# Altium PCB AQM with ESP32-C3.PcbDoc
Units mil, origin at the board's own origin, x right, y up, seen from the top; angles counter-clockwise.
Board outline 2620 x 2460 mil, 4 copper layers (Top Layer, Layer 1 - GND, Layer 2 - Power, Bottom Layer), stack 23.756 mil thick; 60 components, 44 nets, 195 pads, 22 vias.
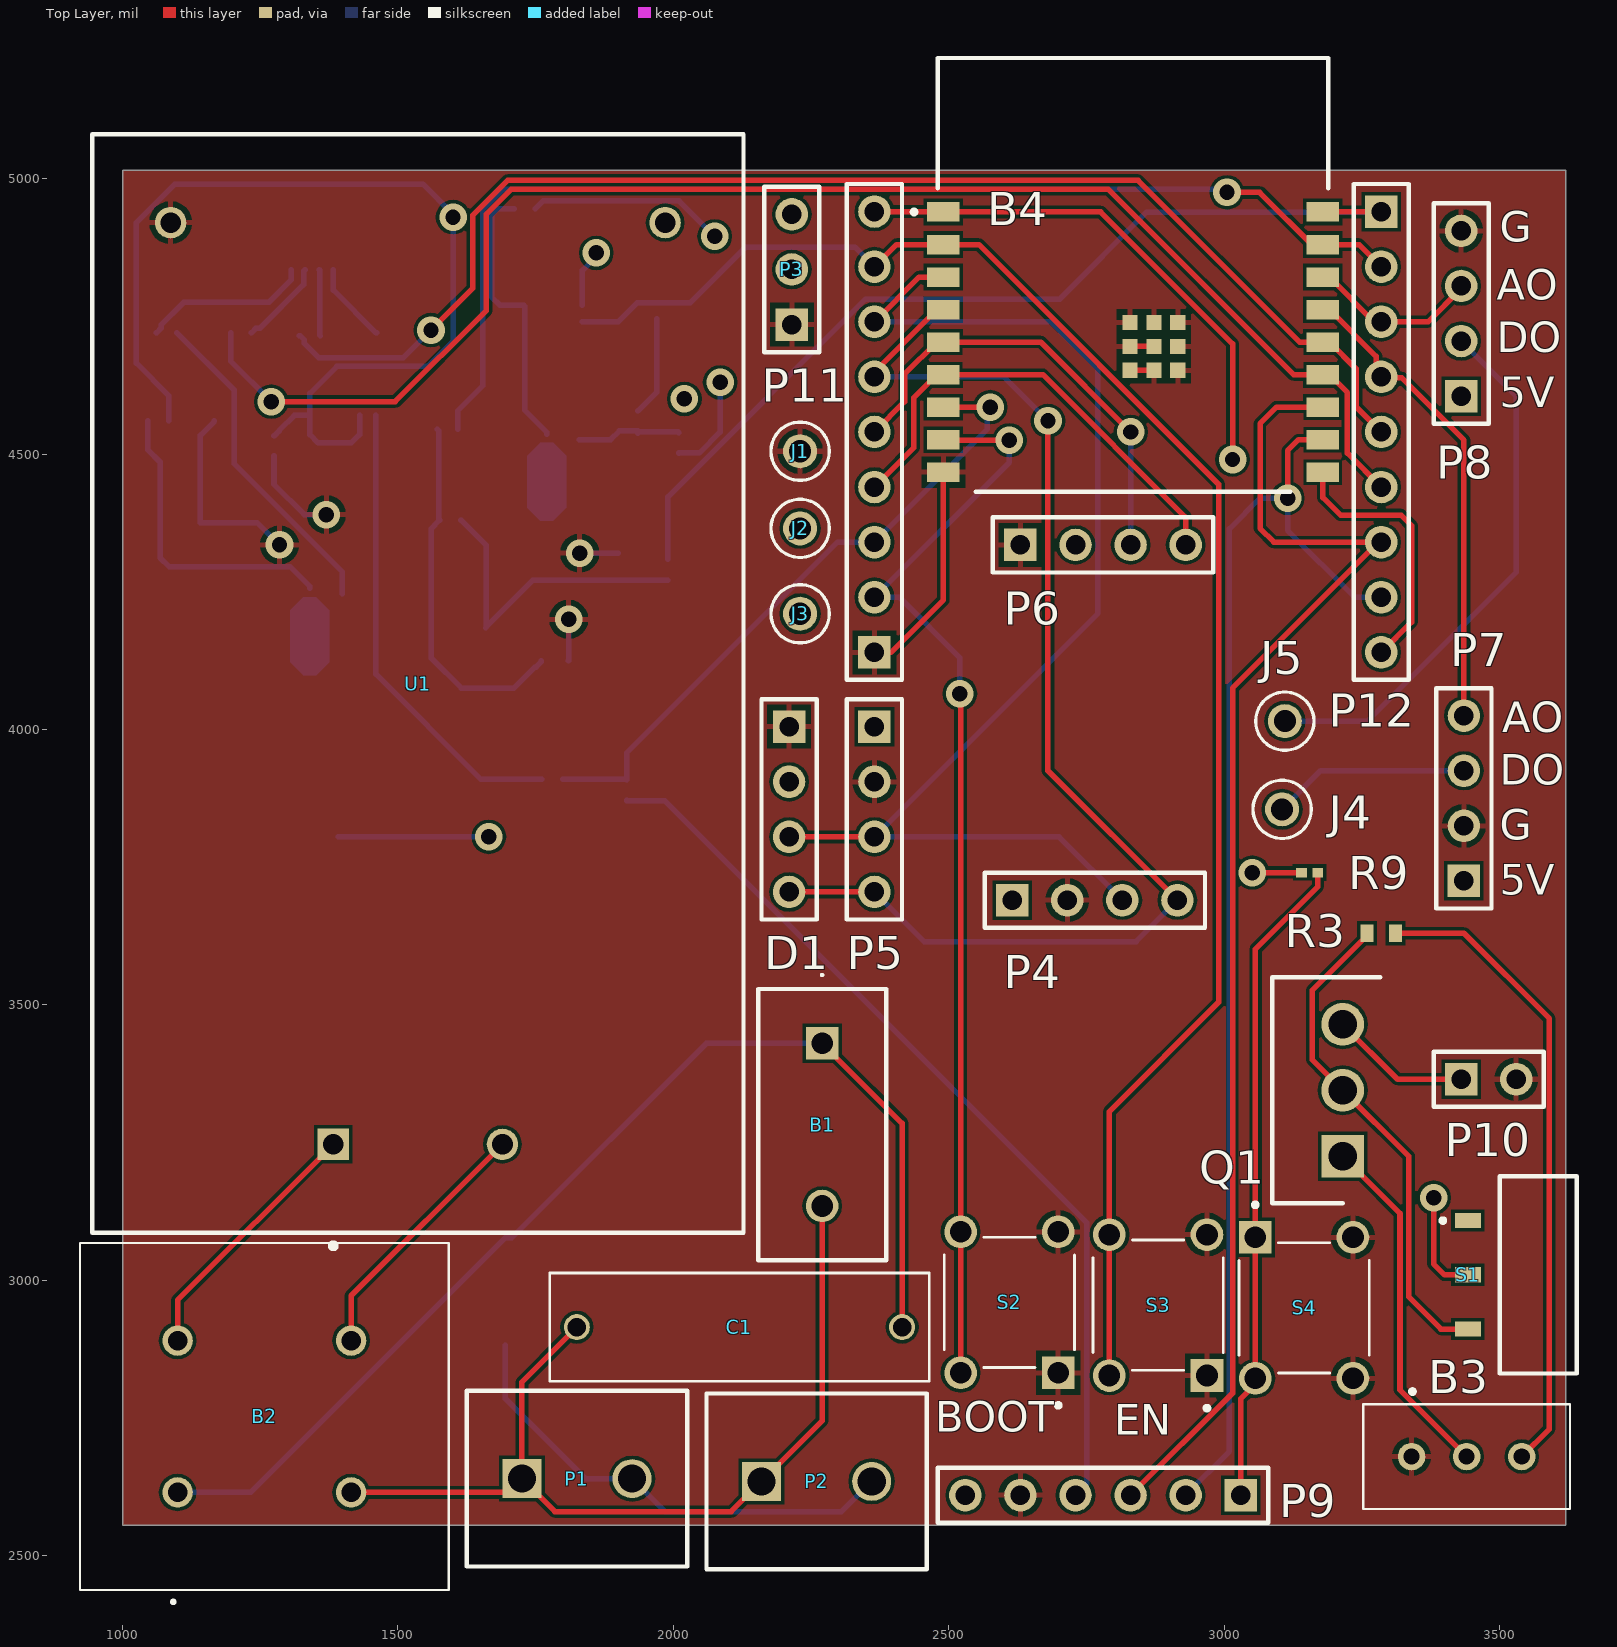
[diagram p0: Top Layer view]
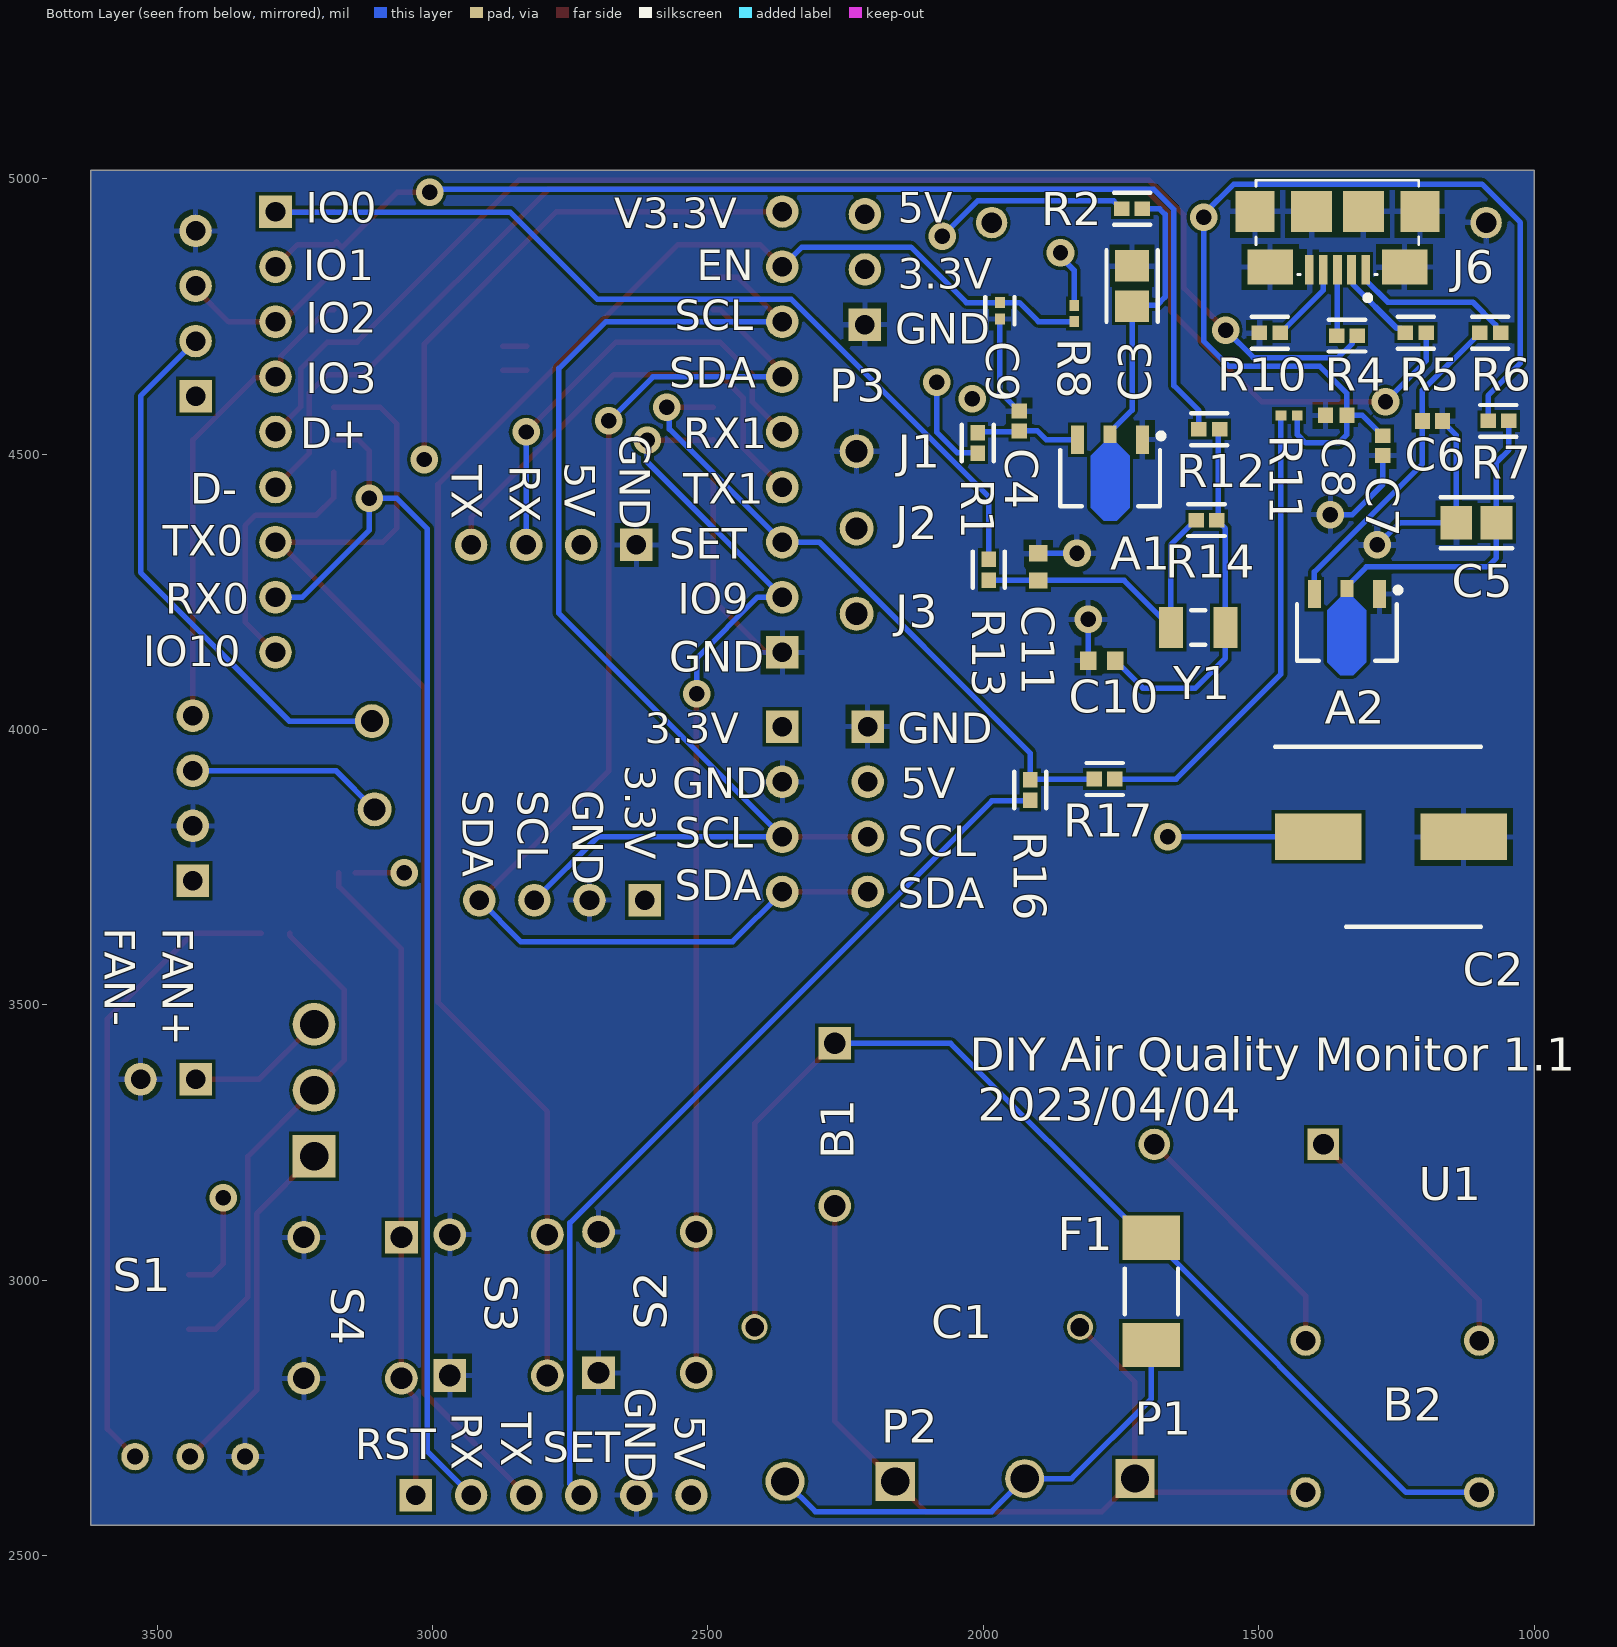
[diagram p1: Bottom Layer view, seen from below]
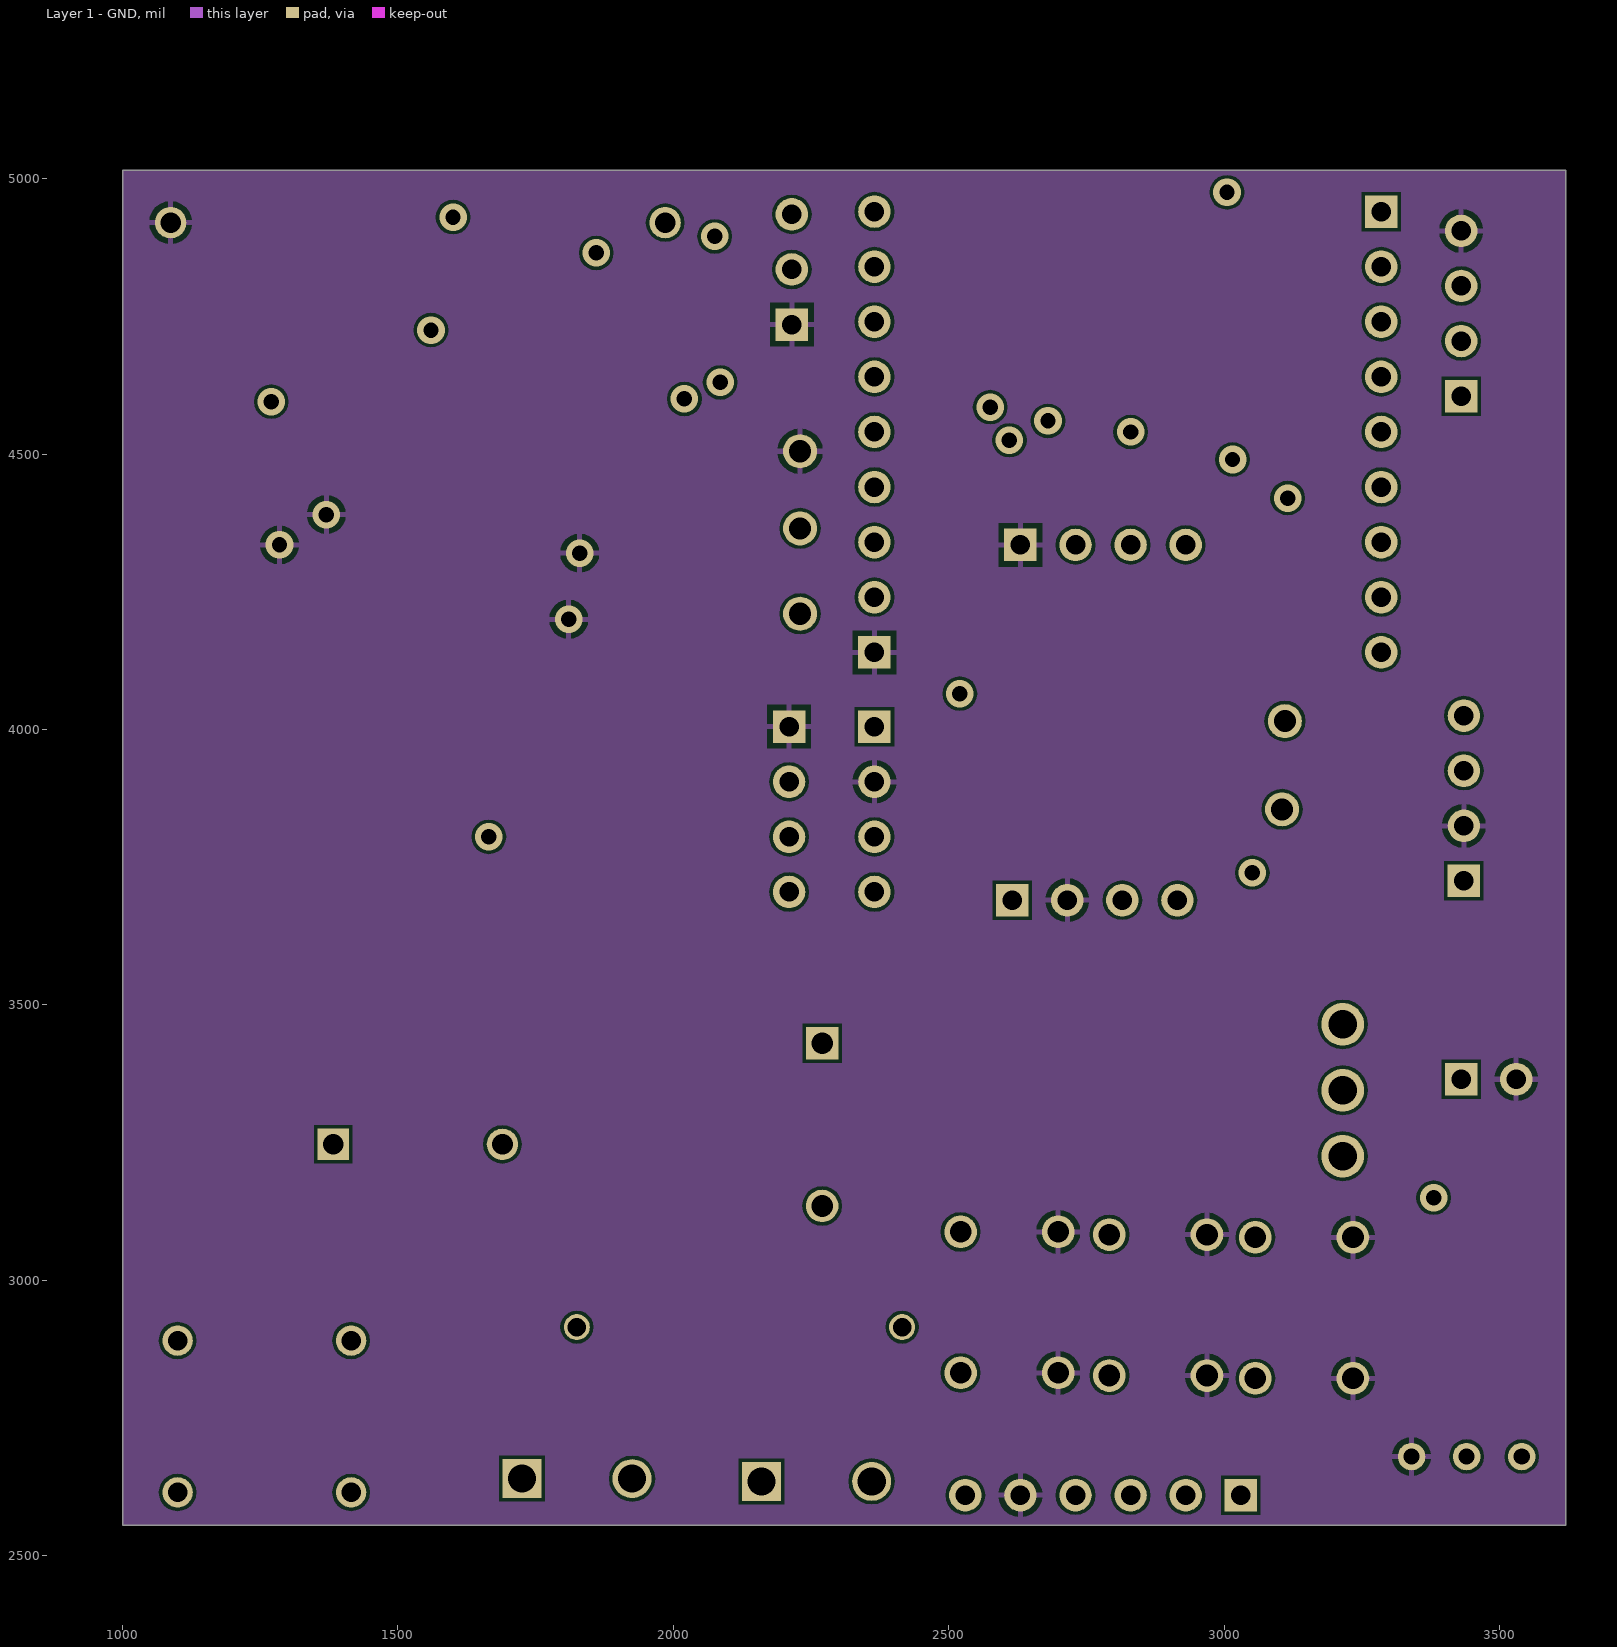
[diagram p2: Layer 1 - GND]
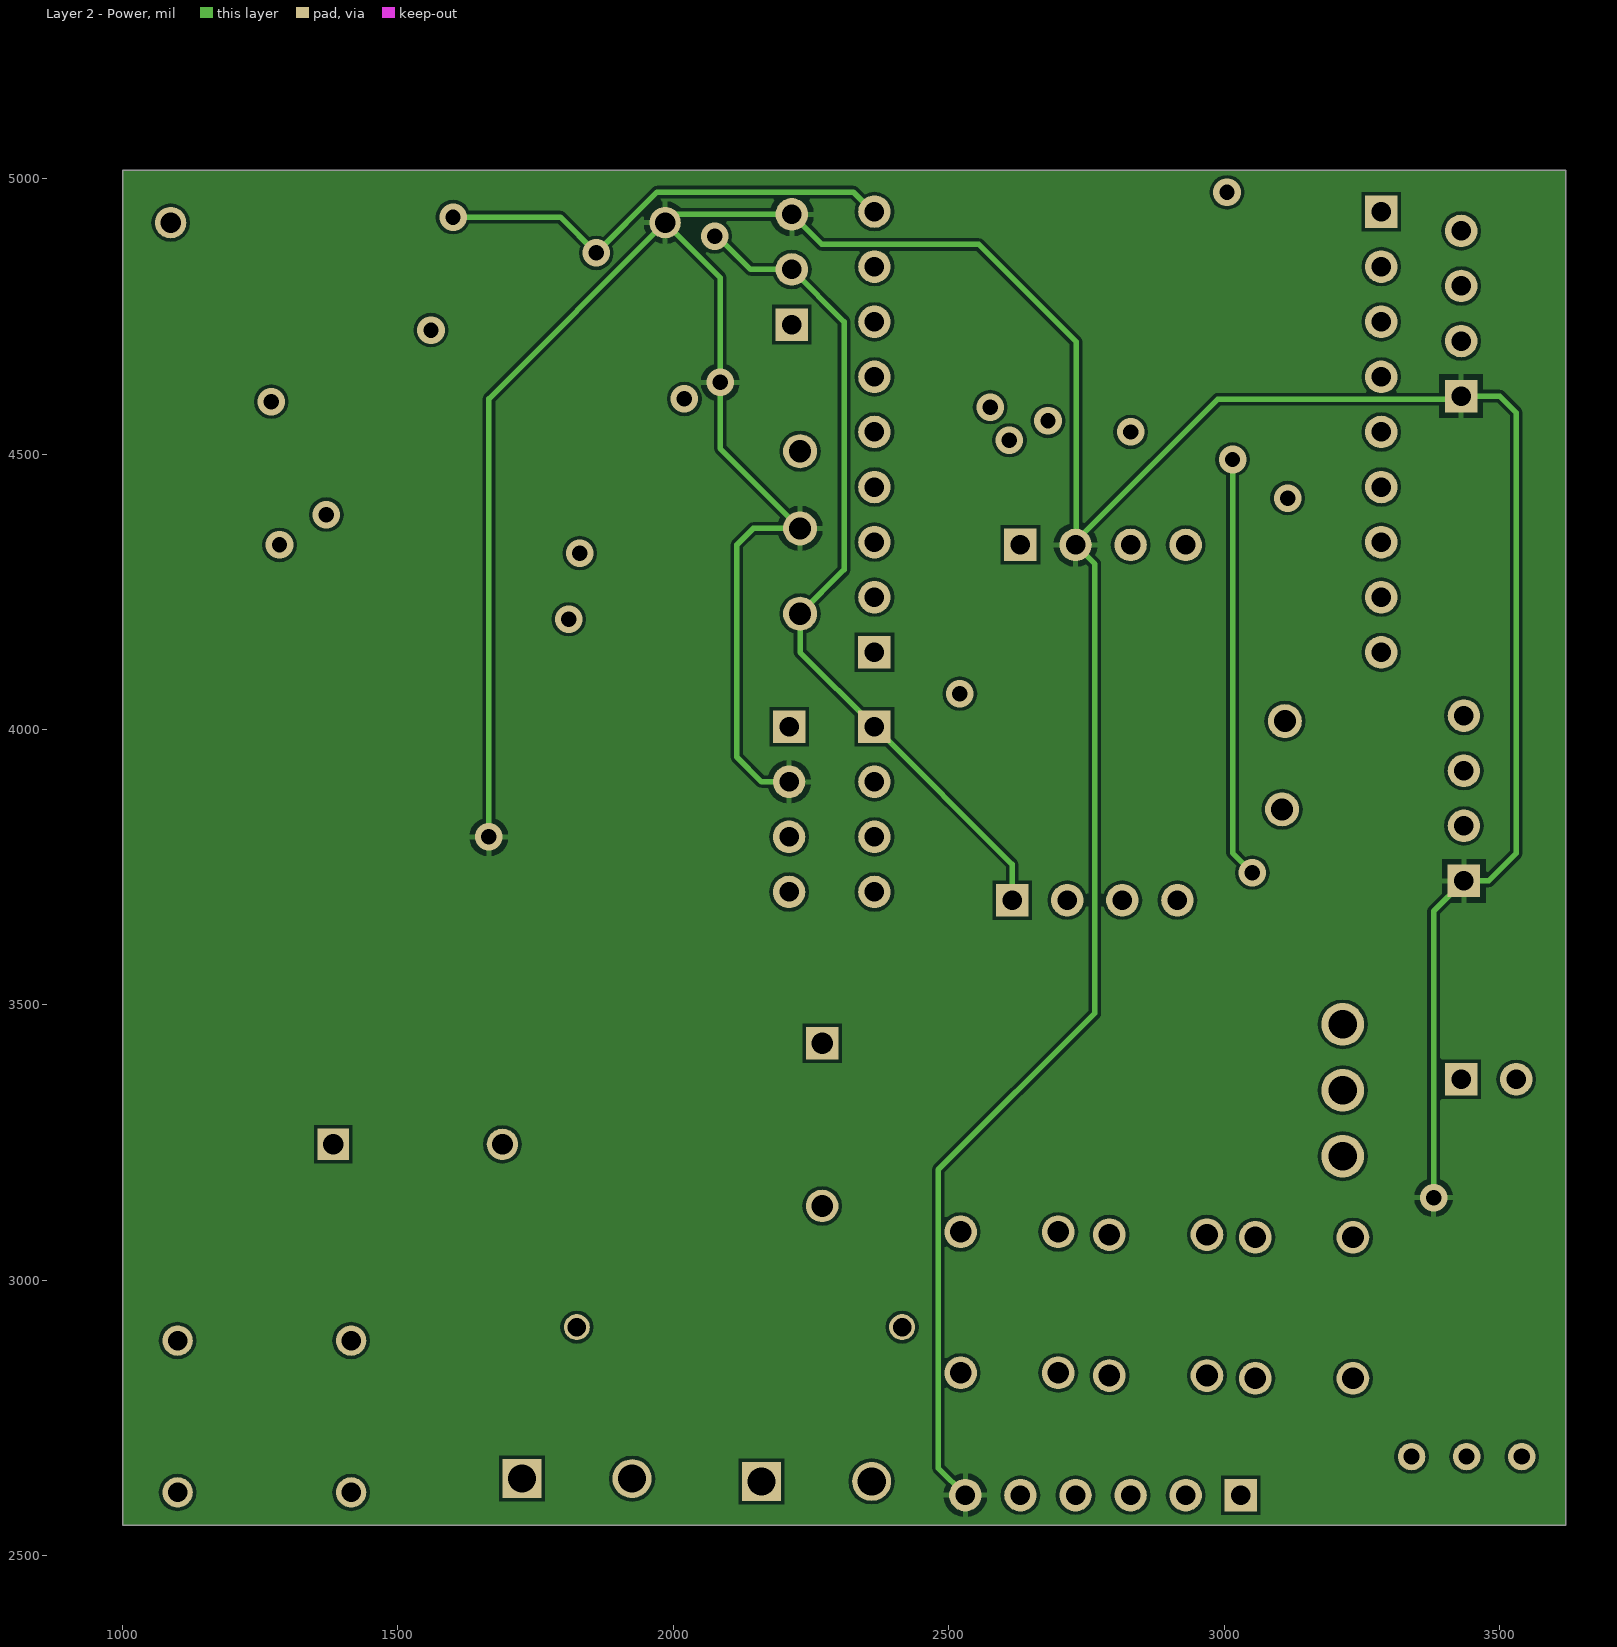
[diagram p3: Layer 2 - Power]
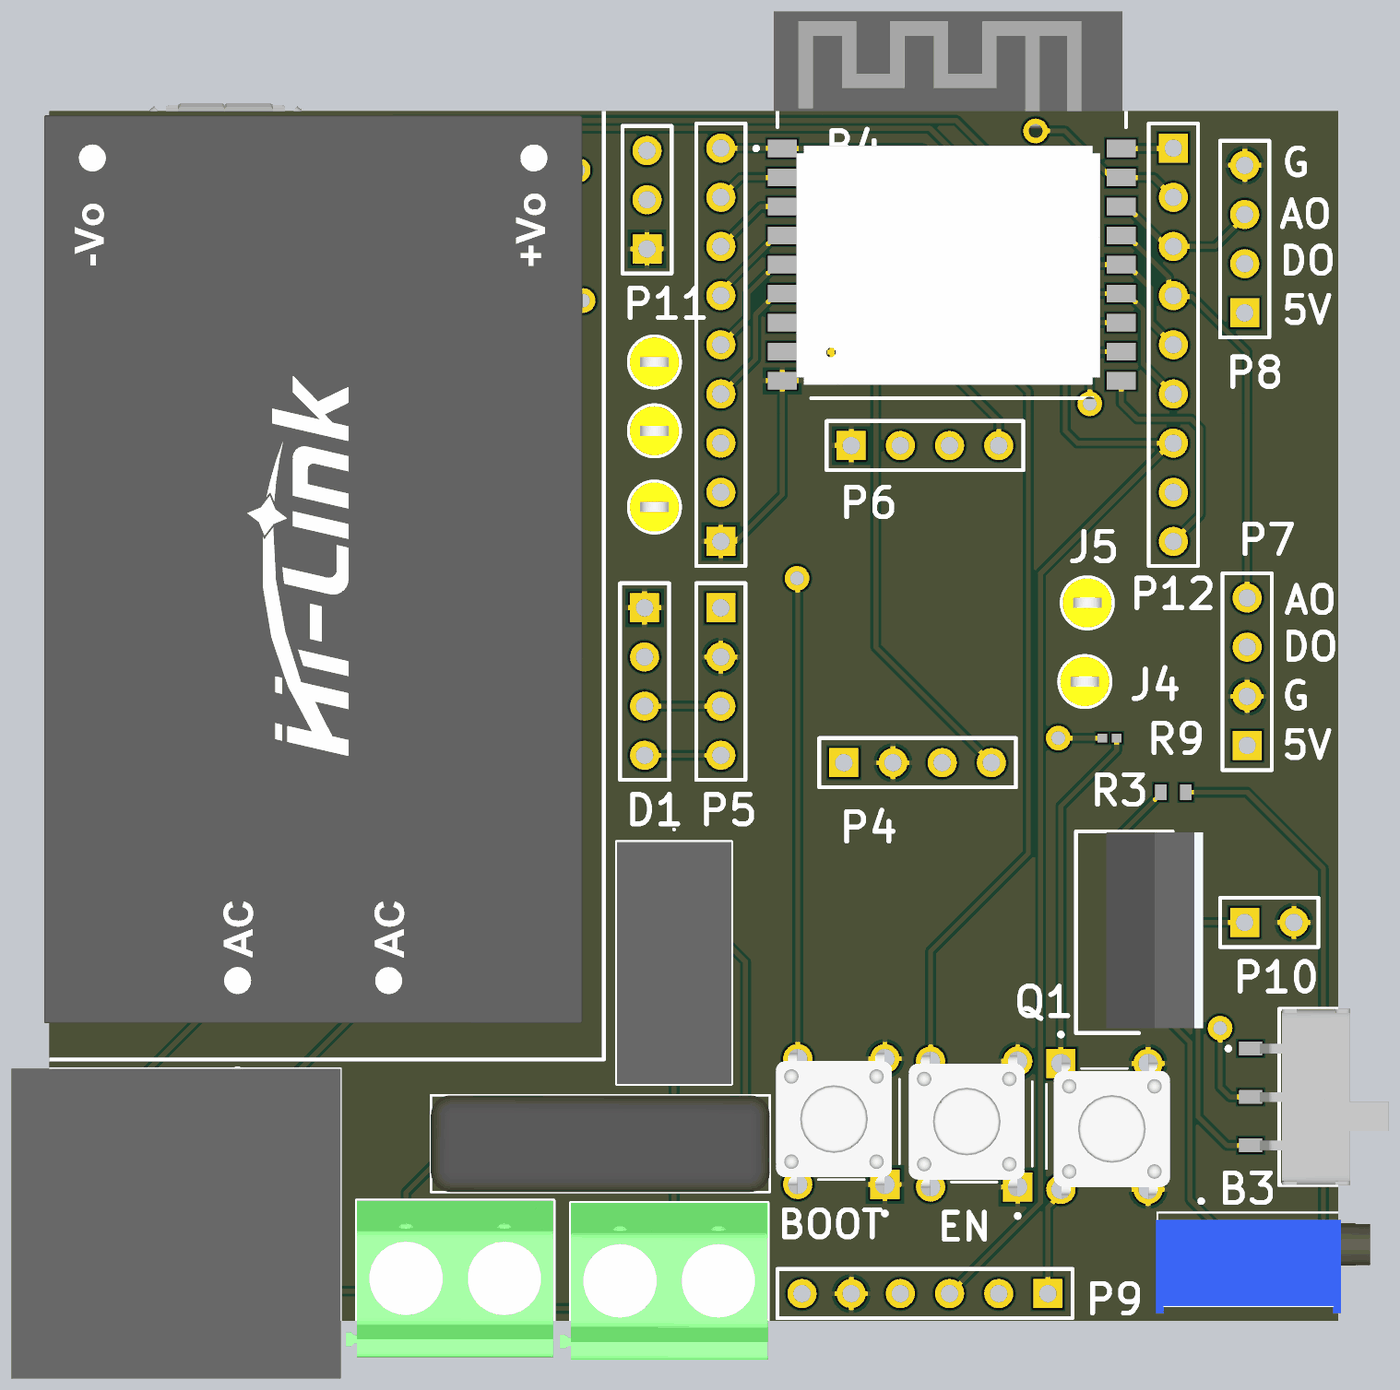
[diagram p4: 3D render of the assembled board from above, using the file's embedded part models]
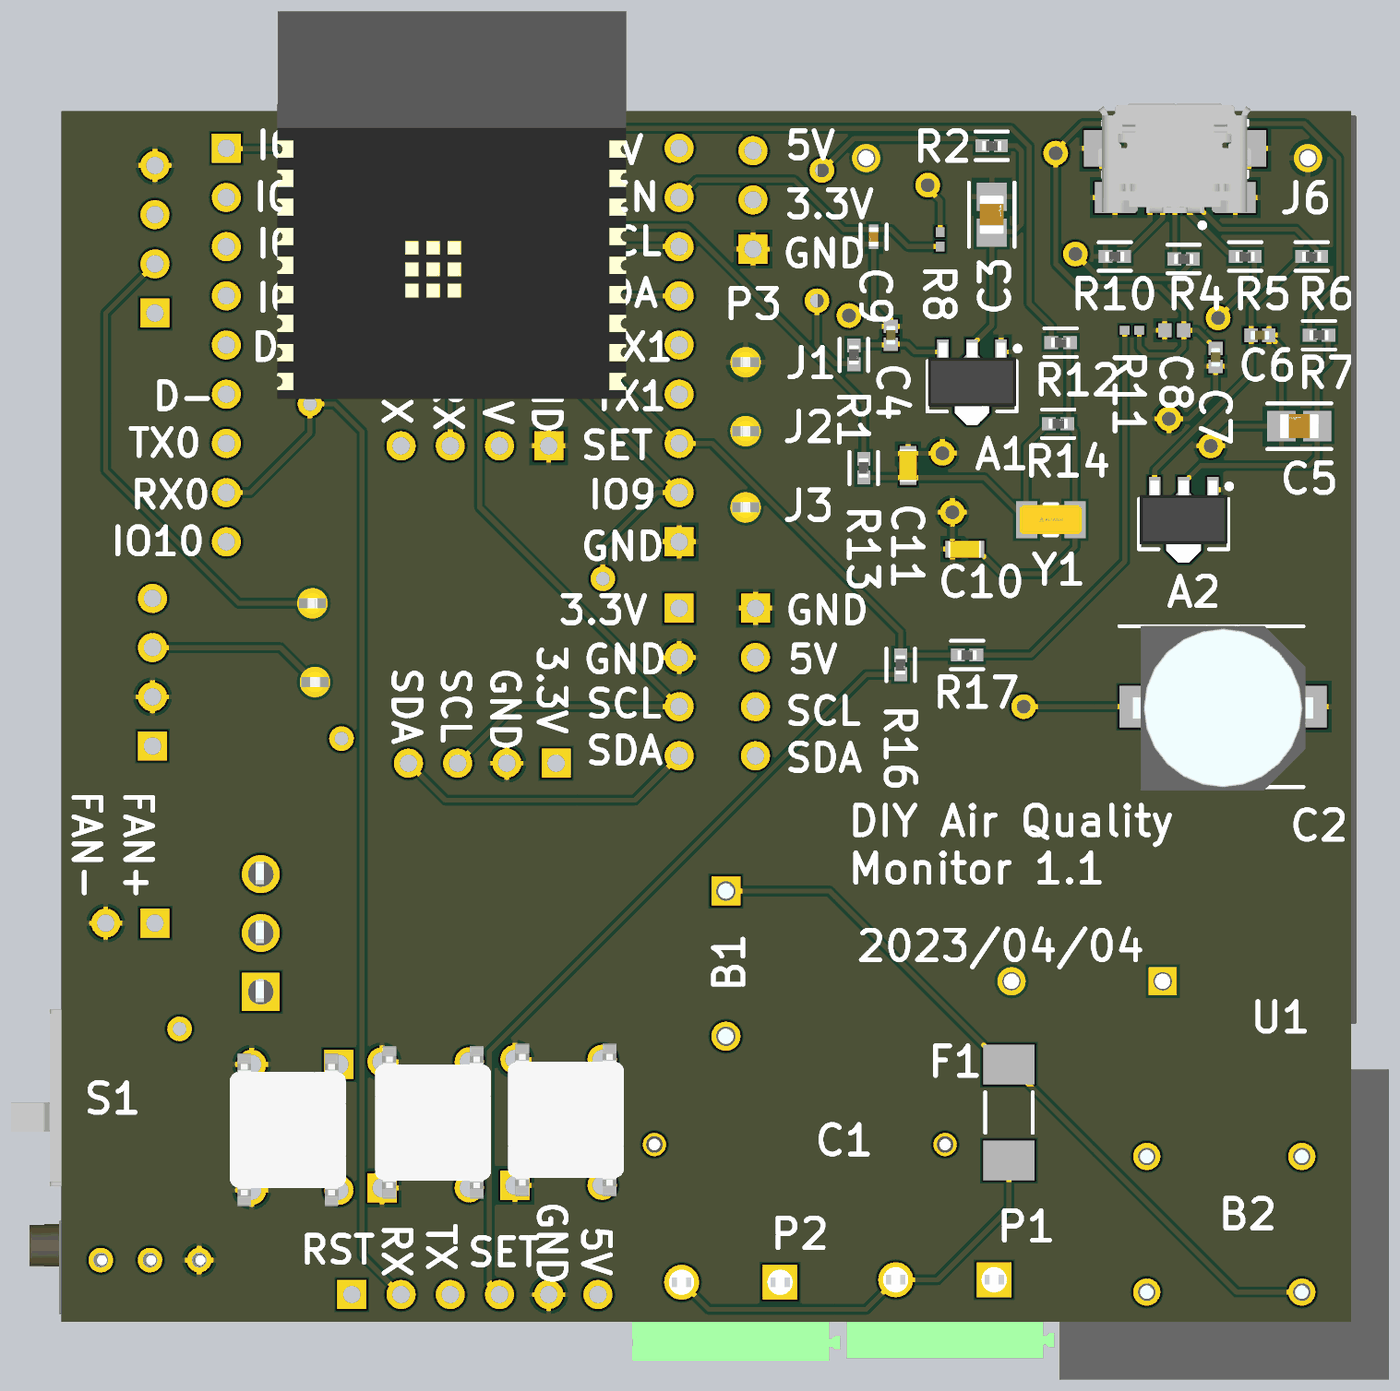
[diagram p5: 3D render of the assembled board from below, using the file's embedded part models]

## Layer stack, top to bottom
Top Solder: solder mask 0.4, Solder Resist, Dk 3.5
Top Layer: signal copper 1.4
Dielectric 2: prepreg 2.8, PP-006, Dk 4.1
Layer 1 - GND: signal copper 1.378
Dielectric 1: dielectric 12.6, FR-4, Dk 4.8
Layer 2 - Power: signal copper 1.378
Dielectric 3: prepreg 2.8, PP-006, Dk 4.1
Bottom Layer: signal copper 1.4
Bottom Solder: solder mask 0.4, Solder Resist, Dk 3.5

## Board outline
1000,2555 3620,2555 3620,5015 1000,5015

## Design rules (kind name [scope] priority, off if disabled: settings)
Clearance [All] p1: gap=5.98 ignorepadtopadclearanceinfootprint=FALSE
MinimumSolderMaskSliver [All] p1: minsoldermaskwidth=0.98
PolygonConnect [All] p1: connectstyle=Relief reliefconductorwidth=10 reliefentries=4 polygonreliefangle="90 Angle" airgapwidth=10
RoutingVias [All] p1: holewidth=28 width=50 viastyle="Through Hole" minholewidth=28 minwidth=50 maxholewidth=28 maxwidth=50
SilkToSilkClearance [All] p1: silktosilkclearance=1
SilkToSolderMaskClearance [IsPad] p1: minsilkscreentomaskgap=5 clearancetoexposedcopper=TRUE
SolderMaskExpansion [All] p1: expansion=4
Width [All] p1: maxlimit=12.01 minlimit=5.98 preferedwidth=10
27 further rules are at their usual default settings.

## Classes and differential pairs
component class "esp32-c3 module": A2 C5 C6 C7 C8 C9 C10 C11 J6 P11 P12 R4 R5 R6 R7 R8 R10 R11 R12 R13 R14 R17 S2 S3 Y1
component class "AQM with esp32": A1 B1 B2 B3 C1 C2 C3 C4 D1 F1 J1 J2 J3 J4 J5 P1 P2 P3 P4 P5 P6 P7 P8 P9 P10 Q1 R1 R2 R3 R9 R16 S1 S4 U1

## Components (designator, comment, footprint, x,y, rotation, side; value= is the part's Value field where it differs from the comment)
A1 "IC1" SOT89-150P350X150-3N 1770,4465 r270 bottom
A2 "IC1" SOT89-150P350X150-3N 1340,4185 r270 bottom
B1 "10D561K" 10D561K 2270,3430.28 r270 top
B2 "UU9.8Y-10MH" UU98Y10MH 1100,2615 r270 top
B3 "3296X-1-103" 3296X1223LF 3440,2680 r270 top
B4 "ESP32-C3-WROOM-02-N4" ESP32C3WROOM02N4 2872.28,4695.24 r0 top
C1 "0.1uF" MPX-104K275VAC-C-D2 2120,2915 r180 top
C2 "220uF" CAPAE830X1050N 1260,3805 r180 bottom
C3 "22uF" FP-GRM219-0_2-0_15-IPC_A 1730,4805 r90 bottom
C4 "10uF" CL05A106MQ5NUNC 1935,4560 r270 bottom
C5 "22uF" FP-GRM219-0_2-0_15-IPC_A 1105,4375 r0 bottom
C6 "10uF" CL05A106MQ5NUNC 1185,4560 r0 bottom
C7 "10uF" CL05A106MQ5NUNC 1275,4515 r270 bottom
C8 "100nF" CAPC1050X55X23ML05T13 1359.29,4570 r0 bottom
C9 "1uF" FP-CL511-IPC_C 1970,4760 r270 bottom
C10 "12pF" CAPC1608X90X30LL10T20 1785,4125 r0 bottom
C11 "12pF" CAPC1608X90X30LL10T20 1900,4295 r90 bottom
D1 "Display" HDR1X4 2210,4005 r270 top
F1 "S6125-M2-0.5A" CAPC6125X25N 1695,2980 r90 bottom
J1 "5004" FP-5004-MFG 2230,4505 r0 top
J2 "5004" FP-5004-MFG 2230,4365 r0 top
J3 "5004" FP-5004-MFG 2230,4210 r0 top
J4 "5004" FP-5004-MFG 3105,3855 r0 top
J5 "5004" FP-5004-MFG 3110,4015 r0 top
J6 "10118192-0001LF" AMPHENOL_10118192-0001LF 1357.24,4834.69 r0 bottom
P1 "AC suppy" PHOE-1729128-2_V 1825,2640 r0 top
P2 "uv lamp" PHOE-1729128-2_V 2260,2635 r0 top
P3 "Header 3" HDR1X3 2215,4735 r90 top
P4 "Hum/Tem Sensor" HDR1X4 2615,3690 r0 top
P5 "CO2/VOC sensor" HDR1X4 2365,4005 r270 top
P6 "CH2O sensor" HDR1X4 2630,4335 r0 top
P7 "CO sensor" HDR1X4 3435,3725 r90 top
P8 "O3 sensor" HDR1X4 3430,4605 r90 top
P9 "PMS5003" HDR1X6 3030,2610 r180 top
P10 "5V FAN" HDR1X2 3430,3365 r0 top
P11 "Header 9" HDR1X9 2365,4140 r90 top
P12 "Header 9" HDR1X9 3285,4940 r270 top
Q1 "2SD313" TO304P498X1010X2089-3P 3215,3225.32 r90 top
R1 "0R" FP-RC0402-0_4-IPC_A 2010,4520 r270 bottom
R2 "0R" FP-RC0402-0_4-IPC_A 1730,4945 r180 bottom
R3 "470Ω" RESC1608X55X25LL10T15 3285,3630 r180 top value=470O
R4 "0R" FP-RC0402-0_4-IPC_A 1340,4715 r180 bottom
R5 "0R" FP-RC0402-0_4-IPC_A 1215,4720 r180 bottom
R6 "0R" FP-RC0402-0_4-IPC_A 1080,4720 r180 bottom
R7 "0R" FP-RC0402-0_4-IPC_A 1065,4560 r0 bottom
R8 "10kΩ" RESC1005X40X25LL05T10 1835,4755 r270 bottom value=10kO
R9 "10kΩ" RESC1005X40X25LL05T10 3155,3740 r0 top value=10kO
R10 "0R" FP-RC0402-0_4-IPC_A 1480,4720 r0 bottom
R11 "10kΩ" RESC1005X40X25LL05T10 1445,4570 r0 bottom value=10kO
R12 "0R" FP-RC0402-0_4-IPC_A 1590,4545 r180 bottom
R13 "0R" FP-RC0402-0_4-IPC_A 1990,4290 r270 bottom
R14 "0R" FP-RC0402-0_4-IPC_A 1595,4380 r180 bottom
R16 "0R" FP-RC0402-0_4-IPC_A 1915,3890 r270 bottom
R17 "0R" FP-RC0402-0_4-IPC_A 1780,3910 r180 bottom
S1 "Switch" SK3245SL1A 3570,3010 r270 top
S2 "TL1105AF160Q" TL1105AF160Q 2610,2960 r90 top
S3 "TL1105AF160Q" TL1105AF160Q 2880,2955 r90 top
S4 "TL1105AF160Q" TL1105AF160Q 3145,2950 r270 top
U1 "HLK-10M05" FP-HLK-10M05-MFG 1536.18,4083.39 r90 top
Y1 "32.768kHz" FP-ABS07-MFG 1610,4185 r180 bottom

## Footprints (in the part's own frame and the unit in brackets; to place one, negate y for a bottom-side part, rotate by r counter-clockwise, add the part's x,y. Pads: shape width x height; smd on the part's side, far side on the other; paste and mask are expansions set on the pad)
10D561K [mm]
  rect 1.5x1.5 hole 1: 1(0,0)
  round 1.5 hole 1: 2(7.5,0)
  silkscreen extent -3.2,-2.95 10,2.95, body extent -2.5,-2.95 10,2.95, height 15.6
3296X1223LF [mm]
  round 1.269 hole 0.74: 1(0,-2.54) 2(0,0) 3(0,2.54)
  silkscreen extent -3.1,-4.76 2.41,4.76, body extent -2.03,-4.83 2.8,6.22, height 10.03
AMPHENOL_10118192-0001LF [mm]
  rect 0.4x1.35 smd: 1(-1.3,0) 2(-0.65,0) 3(0,0) 4(0.65,0) 5(1.3,0)
  rect 2.1x1.6 smd: SH1(-3.1,-0.125) SH2(3.1,-0.125)
  rect 1.8x1.9 smd: SH3(-3.8,-2.675) SH6(3.8,-2.675)
  rect 1.9x1.9 smd: SH4(-1.2,-2.675) SH5(1.2,-2.675)
  silkscreen extent -3.75,-4.13 3.75,1.4, body extent -3.94,-4.99 3.98,0.67, height 3.09
CAPAE830X1050N [mm]
  rect 4x2.15 smd: 1(-3.35,0) 2(3.35,0)
  silkscreen extent -5.35,-4.15 4.15,4.15, body extent -4.65,-4.32 4.65,4.18, height 10.5
CAPC1050X55X23ML05T13 [mm] "Chip Capacitor, 2-Leads, Body 1.05x0.55mm, IPC Low Density"
  rect 0.69x0.72 smd: 1(-0.49,0) 2(0.49,0)
  body extent -0.53,-0.28 0.53,0.27, height 0.55
CAPC1608X90X30LL10T20 [mm] "Chip Capacitor, 2-Leads, Body 1.70x0.90mm, IPC High Density"
  rect 0.75x0.85 smd: 1(-0.625,0) 2(0.625,0)
  body extent -0.85,-0.45 0.85,0.45, height 0.9
CAPC6125X25N [mm] "Chip Capacitor, 2-Leads, Body 6.10x2.50mm, IPC Medium Density"
  rect 2.05x2.65 smd: 1(-2.475,0) 2(2.475,0)
  silkscreen extent -1.05,-1.22 1.05,1.23, body extent -3.15,-1.3 3.15,1.3, height 2.5
CL05A106MQ5NUNC [mm]
  rect 0.69x0.72 smd: 1(-0.46,0) 2(0.46,0)
  body extent -0.5,-0.25 0.5,0.25, height 0.7
ESP32C3WROOM02N4 [mm]
  rect 1.5x0.9 smd: 1(-9.71,6.2) 2(-9.71,4.7) 3(-9.71,3.2) 4(-9.71,1.7) 5(-9.71,0.2) 6(-9.71,-1.3) 7(-9.71,-2.8) 8(-9.71,-4.3) 9(-9.71,-5.8) 10(7.79,-5.8) 11(7.79,-4.3) 12(7.79,-2.8) 13(7.79,-1.3) 14(7.79,0.2) 15(7.79,1.7) 16(7.79,3.2) 17(7.79,4.7) 18(7.79,6.2)
  rect 0.7x0.7 smd: 19(0,0) 20(1.1,0) 21(1.1,1.1) 22(0,1.1) 23(-1.1,1.1) 24(-1.1,0) 25(-1.1,-1.1) 26(0,-1.1) 27(1.1,-1.1)
  silkscreen extent -11.16,-6.7 8.04,13.3, body extent -10.14,-6.73 7.86,13.27, height 1.6
FP-5004-MFG [mm]
  round 1.57 hole 1.02 paste-1000 mask+0: 1(0,0)
  silkscreen extent -1.35,-1.34 1.35,1.34, body extent -1.45,-1.45 1.45,1.45, height 0.25
FP-ABS07-MFG [mm]
  rect 1.1x1.9 smd paste+0 mask+0: 1(-1.25,0) 2(1.25,0)
  silkscreen extent -0.33,-0.8 0.33,0.8, body extent -1.6,-0.75 1.6,0.75, height 0.9
FP-CL511-IPC_C [mil]
  rect 20.29x18.6 smd paste+0 mask+0: 1(-14.9,0) 2(14.9,0)
  silkscreen extent -25,-27 25,27, body extent -20,-10 20,10, height 22
FP-GRM219-0_2-0_15-IPC_A [mil]
  rect 57.27x61.27 smd paste+0 mask+0: 1(-36.45,0) 2(36.45,0)
  silkscreen extent -65,-46 65,46, body extent -39,-25 39,25, height 39
FP-HLK-10M05-MFG [mm]
  rect 1.45x1.45 hole 0.95 paste-1000 mask+0: 1(-21.25,3.9)
  round 1.45 hole 0.95 paste-1000 mask+0: 2(-21.25,-3.9) 3(21.25,11.4) 4(21.25,-11.4)
  silkscreen extent -26.05,-15.01 25.33,15.01, body extent -25.43,-15.11 25.43,15.11, height 0.25
FP-RC0402-0_4-IPC_A [mil]
  rect 28.16x26.48 smd paste+0 mask+0: 1(-18.84,0) 2(18.84,0)
  silkscreen extent -33,-29 33,29, body extent -20,-10 20,10, height 16
HDR1X2 [mm] "Connector; Header; 2 Position"
  rect 1.5x1.5 hole 0.9: 1(0,0)
  round 1.5 hole 0.9: 2(2.54,0)
  silkscreen extent -1.27,-1.27 3.81,1.27
HDR1X3 [mm] "Connector; Header; 3 Position"
  rect 1.5x1.5 hole 0.9: 1(0,0)
  round 1.5 hole 0.9: 2(2.54,0) 3(5.08,0)
  silkscreen extent -1.27,-1.27 6.35,1.27
HDR1X4 [mm] "Connector; Header; 4 Position"
  rect 1.5x1.5 hole 0.9: 1(0,0)
  round 1.5 hole 0.9: 2(2.54,0) 3(5.08,0) 4(7.62,0)
  silkscreen extent -1.27,-1.27 8.89,1.27
HDR1X6 [mm] "Connector; Header; 6 Position"
  rect 1.5x1.5 hole 0.9: 1(0,0)
  round 1.5 hole 0.9: 2(2.54,0) 3(5.08,0) 4(7.62,0) 5(10.16,0) 6(12.7,0)
  silkscreen extent -1.27,-1.27 13.97,1.27
HDR1X9 [mm] "Connector; Header; 9 Position"
  rect 1.5x1.5 hole 0.9: 1(0,0)
  round 1.5 hole 0.9: 2(2.54,0) 3(5.08,0) 4(7.62,0) 5(10.16,0) 6(12.7,0) 7(15.24,0) 8(17.78,0) 9(20.32,0)
  silkscreen extent -1.27,-1.27 21.59,1.27
MPX-104K275VAC-C-D2 [mm]
  round 1.2 hole 0.85: 1(-7.5,0) 2(7.5,0)
  silkscreen extent -8.75,-2.5 8.75,2.5, body extent -8.75,-2.5 8.75,2.5, height 12
PHOE-1729128-2_V [mm] "Receptacle, 2-Leads, Body 8.1x10.16mm, Pitch 5.08mm"
  rect 1.8x1.8 hole 1.3: 1(-2.54,0)
  round 1.8 hole 1.3: 2(2.54,0)
  silkscreen extent -5.08,-4.05 5.08,4.05, body extent -5.65,-4.05 5.08,4.05, height 10.01
RESC1005X40X25LL05T10 [mm] "Chip Resistor, 2-Leads, Body 1.00x0.50mm, IPC High Density"
  rect 0.5x0.45 smd: 1(-0.375,0) 2(0.375,0)
  body extent -0.53,-0.27 0.53,0.28, height 0.4
RESC1608X55X25LL10T15 [mm] "Chip Resistor, 2-Leads, Body 1.70x0.90mm, IPC High Density"
  rect 0.6x0.8 smd: 1(-0.65,0) 2(0.65,0)
  body extent -0.85,-0.45 0.85,0.45, height 0.55
SK3245SL1A [mm]
  rect 0.7x1.2 smd: 1(-2.5,-3.25) 2(0,-3.25) 3(2.5,-3.25)
  silkscreen extent -4.55,-4.5 4.55,1.78, body extent -4.55,-3.62 4.55,3.88, height 3.2
SOT89-150P350X150-3N [mm] "SOT89, 3-Leads, Body 4.50x2.50mm, Pitch 1.50mm, Lead Span 3.5mm, IPC Medium Density"
  rect 1.3x0.6 smd: 1(-1.55,1.5) 3(-1.55,-1.5)
  rect 0.8x0.6 smd: 2(-1.8,0)
  Top Layer region: -1.4,0.3 -0.8,0.9 1.6,0.9 2.2,0.3 2.2,-0.3 1.6,-0.9 -0.8,-0.9 -1.4,-0.3
  silkscreen extent -1.85,-2.3 1.53,2.47, body extent -2.02,-2.27 2.23,2.27, height 1.5
TL1105AF160Q [mm]
  rect 1.508x1.508 / inner round 1.508 / far side rect 1.508x1.508 hole 1: 1(-3.25,-2.25)
  round 1.508 hole 1: 2(3.25,-2.25) 3(-3.25,2.25) 4(3.25,2.25)
  silkscreen extent -4.85,-3 3,3, body extent -3.82,-2.62 4.07,3.38, height 3.21
TO304P498X1010X2089-3P [mm]
  rect 1.965x1.965 / inner round 1.965 / far side rect 1.965x1.965 hole 1.31: 1(0,0)
  round 1.965 hole 1.31: 2(3.04,0) 3(6.08,0)
  silkscreen extent -2.17,-1.74 8.25,3.24, body extent -1.91,-3.3 8.19,1.68, height 19.12
UU98Y10MH [mm]
  round 1.4 hole 0.9: 1(0,0) 2(-7,0) 3(-7,8) 4(0,8)
  silkscreen extent -11.5,-4.5 5.1,12.5, body extent -11.5,-4.5 4.5,12.5, height 14.1

## Part data
A1 A2: library part IC?, "75dB@(120Hz) 1A 1.25V@(1A) ±125?@(Tj) Fixed 3.3V~3.3V Positive 1 20V SOT-89 Linear Voltage Regulators (LDO) ROHS", LCSC Part #=C2904742, Manufacturer=YONGYUTAI, Mfr. Part #=AMS1117-3.3, Package=SOT-89, Datasheet=https://datasheet.lcsc.com/lcsc/2110121330_YONGYUTAI-AMS1117-3-3_C2904742.pdf
B1: "920V 42.3J 180pF@1kHz 460V 350V 504V~616V 2.5kA Plugin Varistors ROHS", LCSC Part #=C113236, Manufacturer="Hongzhi Elec", Package=Plugin, Datasheet=https://datasheet.lcsc.com/lcsc/1811141751_Hongzhi-Elec-10D561K_C113236.pdf, Mfr. Part #=10D561K
B2: "10mH@1kHz 1.2O 2 500mA 50V Plugin Common Mode Filters ROHS", LCSC Part #=C75192, Manufacturer="FH (Guangdong Fenghua Advanced Tech)", Package=Plugin, Datasheet=https://datasheet.lcsc.com/lcsc/1810311213_FH--Guangdong-Fenghua-Advanced-Tech-UU9-8Y-10mH_C75192.pdf, Mfr. Part #=UU9.8Y-10MH
B3: "±10% 10kO Plugin Variable Resistors/Potentiometers ROHS", LCSC Part #=C118955, Manufacturer="BOCHEN(Chengdu Guosheng Tech)", Package=Plugin, Datasheet=https://datasheet.lcsc.com/lcsc/1811011704_BOCHEN-Chengdu-Guosheng-Tech-3296X-1-103_C118955.pdf, Mfr. Part #=3296X-1-103
B4: "WiFi Modules (802.11) (Engineering Samples) SMD module, ESP32-C3, 4MB SPI flash, PCB antenna, -40 C +85 C", LCSC Part #=C2934560, Manufacturer="Espressif Systems", Datasheet=https://www.espressif.com/sites/default/files/documentation/esp32-c3-wroom-02_datasheet_en.pdf, Mfr. Part #=ESP32-C3-WROOM-02-N4
C1: library part MPX-104K275VAC-C-D2, "X2 100nF ±10% 275V Plugin,P=15mm Suppression Capacitors ROHS", LCSC Part #=C914484, Manufacturer=NDF, Mfr. Part #=X2-104K-275VAC, Package=Plugin,P=15mm, Datasheet=https://datasheet.lcsc.com/lcsc/2201131300_NDF-X2-104K-275VAC_C914484.pdf
C2: library part UUR1C221MNL1GS, "-40?~+85? 2000hrs@85? 220uF 10mm 16V 8mm 215mA@120Hz ±20% SMD,D8xL10mm Aluminum Electrolytic Capacitors - SMD ROHS", LCSC Part #=C445237, Manufacturer=Nichicon, Package=SMD,D8xL10mm, Datasheet=https://datasheet.lcsc.com/lcsc/2002121532_Nichicon-UUR1C221MNL1GS_C445237.pdf, Mfr. Part #=UUR1C221MNL1GS
C3 C5: library part CMP-06035-056251-1, "Chip Multilayer Ceramic Capacitors for General Purpose, 0805, 22uF, X5R, 15%, 20%, 16V", LCSC Part #=C162295, Manufacturer="Murata Electronics", Mfr. Part #=GRM219R61C226ME15L, Package=0805, Datasheet=https://datasheet.lcsc.com/lcsc/1811141821_Murata-Electronics-GRM219R61C226ME15L_C162295.pdf
C4 C6 C7: library part CL05A106MQ5NUNC, "6.3V 10uF X5R ±20% 0402 Multilayer Ceramic Capacitors MLCC - SMD/SMT ROHS", LCSC Part #=C15525, Manufacturer="Samsung Electro-Mechanics", Package=0402, Datasheet Link=https://datasheet.datasheetarchive.com/originals/distributors/Datasheets-DGA10/2406160.pdf, Mfr. Part #=CL05A106MQ5NUNC
C8: library part CMP-2000-05439-1, "X7R 100nF 16V ±10% 0402 Multilayer Ceramic Capacitors MLCC - SMD/SMT ROHS", LCSC Part #=C1525, Manufacturer="Samsung Electro-Mechanics", Mfr. Part #=CL05B104KO5NNNC, Package=0402, Datasheet=https://datasheet.lcsc.com/lcsc/1810191219_Samsung-Electro-Mechanics-CL05B104KO5NNNC_C1525.pdf
C9: library part CMP-13271-001936-1, "X5R 10V 1uF ±10% 0402 Multilayer Ceramic Capacitors MLCC - SMD/SMT ROHS", LCSC Part #=C14445, Manufacturer="Samsung Electro-Mechanics", Mfr. Part #=CL05A105KP5NNNC, Package=0402, Datasheet=https://datasheet.lcsc.com/lcsc/1810191214_Samsung-Electro-Mechanics-CL05A105KP5NNNC_C14445.pdf
C10 C11: library part CMP-2000-06098-1, "50V 12pF C0G ±5% 0603 Multilayer Ceramic Capacitors MLCC - SMD/SMT ROHS", LCSC Part #=C38523, Manufacturer="Samsung Electro-Mechanics", Mfr. Part #=CL10C120JB8NNNC, Package=0603, Datasheet=https://datasheet.lcsc.com/lcsc/1810261515_Samsung-Electro-Mechanics-CL10C120JB8NNNC_C38523.pdf
D1: library part "Header 4", "Header, 4-Pin", LatestRevisionDate=17-Jul-2002, LatestRevisionNote="Re-released for DXP Platform.", Publisher="Altium Limited"
F1: "SMD Fuses ROHS", LCSC Part #=C845172, Manufacturer="SART(Nanjing Sart Tech)", Package=SMD, Datasheet=https://datasheet.lcsc.com/lcsc/2201242130_SART-Nanjing-Sart-Tech-S6125-M2-0-5A_C845172.pdf, Mfr. Part #=S6125-M2-0.5A
J1 J2 J3 J4 J5: library part CMP-2000-05575-2, "PC TEST POINT MINIATURE YELLOW", LCSC Part #=C2906762, Manufacturer=Keystone, ComponentLink2Description=Datasheet, ComponentLink2URL=https://www.keyelco.com/product-pdf.cfm?p=1313, Datasheet=https://datasheet.lcsc.com/lcsc/2201121200_Keystone-5004_C2906762.pdf, Mfr. Part #=5004, Package=5004
J6: "Single Port 5 Contact Horizontal Right Angle Shielded Micro B USB 2.0 Connector", LCSC Part #=C132564, Manufacturer="Amphenol ICC", Package=SMD, Datasheet=https://datasheet.lcsc.com/lcsc/2111290930_Amphenol-ICC-10118192-0001LF_C132564.pdf, Mfr. Part #=10118192-0001LF
P1 P2: library part CMP-2000-05815-1, "13.5A 400V Green Straight pin 5.08mm 1 2 Plugin,P=5.08mm Screw terminal ROHS", LCSC Part #=C91153, Manufacturer="Phoenix Contact", Mfr. Part #=1729128, Package=Plugin,P=5.08mm, Datasheet=https://www.farnell.com/datasheets/2617011.pdf
P3: "Header, 3-Pin", LatestRevisionDate=17-Jul-2002, LatestRevisionNote="Re-released for DXP Platform.", Publisher="Altium Limited"
P4: library part "Header 4", "Si7021 Header, 4-Pin"
P5: library part "Header 4", "SGP30 Header, 4-Pin", LatestRevisionDate=17-Jul-2002, LatestRevisionNote="Re-released for DXP Platform.", Publisher="Altium Limited"
P6: library part "Header 4", "- Sensor Modules ROHS", LCSC Part #=C141344, Manufacturer="Zhengzhou Winsen Elec Tech", Mfr. Part #=ZE08-CH2O
P7: library part "Header 4", "MQ7 Header, 4-Pin", LatestRevisionDate=17-Jul-2002, LatestRevisionNote="Re-released for DXP Platform.", Publisher="Altium Limited"
P8: library part "Header 4", "MQ131 Header, 4-Pin", LatestRevisionDate=17-Jul-2002, LatestRevisionNote="Re-released for DXP Platform.", Publisher="Altium Limited"
P9: library part "Header 6", "PMS5003 Sensor Modules ROHS", LCSC Part #=C91431, Manufacturer="Beijing Plantower", Datasheet=https://datasheet.lcsc.com/lcsc/1810251510_Beijing-Plantower-PMS5003_C91431.pdf, Mfr. Part #=PMS5003, Package=PMS5003
P10: library part "Header 2", "Header, 2-Pin", LatestRevisionDate=17-Jul-2002, LatestRevisionNote="Re-released for DXP Platform.", Publisher="Altium Limited"
P11 P12: "Header, 9-Pin", LatestRevisionDate=17-Jul-2002, LatestRevisionNote="Re-released for DXP Platform.", Publisher="Altium Limited"
Q1: "NPN Transistor, TO-220", LCSC Part #=C3031919, Manufacturer="Jiangsu Changjing Electronics Technology Co., Ltd.", Package=TO-220, Datasheet=https://datasheet.lcsc.com/lcsc/2206081730_Jiangsu-Changjing-Electronics-Technology-Co---Ltd--2SD313_C3031919.pdf, Mfr. Part #=2SD313
R1 R2 R4 R5 R6 R7 R10 R12 R13 R14 R16 R17: library part CMP-2002-07342-2, "RES SMD 0 OHM JUMPER 1/16W 0402", LCSC Part #=C106231, Manufacturer=Yageo, Mfr. Part #=RC0402FR-070RL, Package=0402, Datasheet=https://www.lcsc.com/product-detail/Chip-Resistor-Surface-Mount_YAGEO-RC0402FR-070RL_C106231.html
R3: library part CMP-1659-00035-2, "100mW Thick Film Resistors 75V ±100ppm/? ±1% -55?~+155? 470O 0603 Chip Resistor - Surface Mount ROHS", LCSC Part #=C114669, Manufacturer=YAGEO, Mfr. Part #=RC0603FR-07470RL, Package=0603, ComponentLink1Description="Manufacturer URL", ComponentLink1URL=http://www.yageo.com/, ComponentLink2Description=Datasheet, ComponentLink2URL=https://datasheet.ciiva.com/11808/0900766b80f96399-11808177.pdf, Datasheet=https://datasheet.lcsc.com/lcsc/1810161617_YAGEO-RC0603FR-07470RL_C114669.pdf
R8 R9 R11: library part CMP-2002-07353-1, "50V 10kO Thick Film Resistors 62.5mW ±1% -55?~+155? ±100ppm/? 0402 Chip Resistor - Surface Mount ROHS", LCSC Part #=C60490, Manufacturer=YAGEO, Mfr. Part #=RC0402FR-0710KL, Package=0402
S1: library part SK-3245S-L1-A, "Surface Mount 50mA DPDT 3.2mm 12V 9.1mm 12V 3.55mm 50mA 10000 SMDSplicing Rectangular columnar -40?~+85? Black SMD Slide Switches ROHS", LCSC Part #=C405951, Manufacturer="XKB Connectivity", Package=SMD, Datasheet=https://datasheet.lcsc.com/lcsc/2002271841_XKB-Connectivity-SK-3245S-L1-A_C405951.pdf, Mfr. Part #=SK-3245S-L1-A
S2 S3 S4: "6mm 1.4mm Round Button 50mA Straight 6mm SPST 12V Plugin,6x6mm Tactile Switches ROHS", LCSC Part #=C273465, Manufacturer=E-Switch, Package=Plugin,6x6mm, Datasheet=https://datasheet.lcsc.com/lcsc/1809291031_E-Switch-TL1105AF160Q_C273465.pdf, Mfr. Part #=TL1105AF160Q
U1: library part CMP-218581-000001-1, "5V 2A 90VAC~265VAC 1 120V~350V Isolated Regulated 10W AC-DC 80% Plugin Power Modules ROHS", LCSC Part #=C403745, Manufacturer=HI-LINK, Package=Plugin, Mfr. Part #=HLK-10M05
Y1: library part CMP-0447-00001-4, "-40?~+85? 32.768kHz 12.5pF 70kO ±20ppm SMD3215-2P Crystals ROHS", LCSC Part #=C130253, Manufacturer="Abracon LLC", Mfr. Part #=ABS07-32.768KHZ-T, Package=SMD3215-2P, Datasheet=https://datasheet.lcsc.com/lcsc/1809211224_Abracon-LLC-ABS07-32-768KHZ-T_C130253.pdf

## Via types
v1: diameter 50, hole 28, Top Layer to Bottom Layer, 22 vias

## Nets (pads, with @x,y where several pads share a name; then routed paths per layer and width w, separated by ;. In a path a pad name is that pad's centre, name@x,y a point inside that pad or via, vN(x,y) a via of type N, cw(c..) or ccw(c..) an arc to the next point about the centre after c; other vN are vias at no path point)
3.3V: J3.1 P3.2 P4.1 P5.1 R2.1 | length 1900.7
  Layer 2 - Power w10: v1(2075,4895) 2080,4895 2140,4835 P3.2 2310,4740 2310,4290 J3.1 2230,4140 P5.1 2615,3755 P4.1
  Bottom Layer w10: R2.1 1763.37,4959.53 2010.47,4959.53 v1(2075,4895)
5V: C2.1 D1.2 J2.1 P3.3 P6.2 P7.1 P8.1 P9.6 R1.2 S1.2 U1.4 | length 8705.4
  Top Layer w10: v1(3380,3150) 3380,3030 3400,3010 S1.2
  Layer 2 - Power w10: v1(1665,3805) 1665,4600 U1.4 ; D1.2 2160,3905 2115,3950 2115,4335 2145,4365 J2.1 2085,4510 v1(2085,4630) 2085,4820 U1.4 ; P9.6 2480.75,2659.25 2480.75,3200.75 2765,3485 2765,4300 P6.2 P6.2@2730,4340.89 ; v1(3380,3150) 3380,3670 P7.1 3480,3725 3530,3775 3530,4575 3500,4605 P8.1 3424.49,4599.49 2988.6,4599.49 P6.2@2730,4340.89 ; U1.4 2000,4935 P3.3 2269.49,4880.51 2554.49,4880.51 2730.98,4704.02 2730.98,4341.87 P6.2@2730,4340.89
  Bottom Layer w10: C2.1 v1(1665,3805) ; R1.2 2010,4502 2047.11,4502 2085,4539.9 v1(2085,4630)
D+: B4.14 P12.5 R4.2 | length 2424.2
  Top Layer w10: v1(1560,4725) 1635.98,4800.98 1635.98,4933.59 1698.89,4996.5 2843.5,4996.5 3136.89,4703.11 B4.14 3190.79,4703.11 3239.56,4654.34 3239.56,4585.44 P12.5
  Bottom Layer w10: R4.2 1322,4715 1330.24,4706.76 1330.24,4700.75 1355.99,4675 1510,4675 v1(1560,4725)
D-: B4.13 P12.6 R5.2 | length 2721
  Top Layer w10: v1(1270,4595) 1495,4595 1660,4760 1660,4935 1705.51,4980.51 2789.49,4980.51 3125.94,4644.06 B4.13 3190.79,4644.06 3223.57,4611.27 3223.57,4501.43 P12.6
  Bottom Layer w10: R5.2 1196.16,4668.84 v1(1270,4595)
DOUT1: J4.1 P7.3 | length 359
  Bottom Layer w10: J4.1 3175,3925 P7.3
DOUT2: J5.1 P8.2 | length 993.3
  Bottom Layer w10: J5.1 3260,4015 3530,4285 3530,4605 P8.2
EN: B4.2 C9.1 P11.8 R8.2 S3.3 S3.4 | length 3122.9
  Top Layer w10: P11.8 2405.28,4880.28 B4.2 2554.72,4880.28 2990,4445 2990,3505 2791.42,3306.42 S3.4 S3.3
  Bottom Layer w10: R8.2 1900.02,4740.24 1934.69,4774.9 C9.1 2030.79,4774.9 2131.4,4875.51 2329.49,4875.51 P11.8
GND: A1.1 A2.1 B3.1 B4.9 B4.19 B4.20 B4.21 B4.22 B4.23 B4.24 B4.25 B4.26 B4.27 C2.2 C3.2 C4.1 C5.2 C6.1 C7.2 C8.2 C9.2 C10.2 C11.2 D1.1 J1.1 J6.5 J6.SH1 J6.SH2 J6.SH3 J6.SH4 J6.SH5 J6.SH6 P3.1 P4.2 P5.2 P6.1 P7.2 P8.4 P9.5 P10.2 P11.1 R10.2 S2.1 S2.2 S3.1 S3.2 S4.3 S4.4 U1.3 | length 1335.3
  Top Layer w10: P11.1 2395,4140 2490,4235 B4.9 ; B4.25 B4.26 ; B4.24 B4.19
  Bottom Layer w10: C6.1 1166.89,4559.41 1141.45,4533.97 C5.2 1245,4375 v1(1285,4335) ; C7.2 1275,4445 1330,4390 v1(1370,4390) ; C10.2 1809.8,4125.2 1809.8,4199.8 v1(1810,4200) ; v1(1830,4320) 1830.2,4319.8 1899.8,4319.8 C11.2 ; C4.1 1935.59,4578.11 1970,4612.52 C9.2
IO0: B4.18 P12.1 R13.1 | length 1729.2
  Top Layer w10: B4.18 3284.33,4939.33 P12.1
  Bottom Layer w10: R13.1 1990,4422.29 2349.06,4781.35 2701.35,4781.35 2859.02,4939.02 3284.02,4939.02 P12.1
IO1: B4.17 P12.2 R12.1 | length 2130.3
  Top Layer w10: v1(3005,4975) 3064.25,4975 3164.25,4875 3174.25,4885 B4.17 3244.72,4880.28 P12.2
  Bottom Layer w10: R12.1 1608.84,4578.84 1654.02,4624.02 1654.02,4944.02 1690.51,4980.51 2999.49,4980.51 v1(3005,4975)
IO2: B4.16 P8.3 P12.3 | length 314.5
  Top Layer w10: B4.16 3190.79,4821.22 3272.01,4740 P12.3 3370,4740 3430,4800 P8.3
IO3: B4.15 P7.4 P12.4 | length 870.9
  Top Layer w10: B4.15 3190.79,4762.17 3275.61,4677.34 3275.61,4649.39 P12.4 3286.82,4638.18 3322.23,4638.18 3435,4525.41 P7.4
IO9: B4.8 P11.2 S2.3 S2.4 | length 2006
  Top Layer w10: B4.8 2490.94,4525 v1(2610,4525) ; v1(2520,4065) 2521.42,4063.58 S2.4 S2.3
  Bottom Layer w10: v1(2520,4065) 2520,4130 2410,4240 P11.2 2610,4485 v1(2610,4525)
IO10: B4.10 P12.9 | length 480.8
  Top Layer w10: B4.10 3178.98,4421.02 3211.02,4388.98 3321.02,4388.98 3340,4370 3340,4195 P12.9
NetA1_2: A1.2 C3.1 R2.2 | length 511.4
  Bottom Layer w10: R2.2 1680,4945 1670,4935 1670,4785 1685,4770 1728.55,4770 C3.1 1730,4579.8 1770,4539.8 A1.2
NetA1_3: A1.3 C4.2 R1.1 | length 189.6
  Bottom Layer w10: A1.3 1886.02,4526.02 1901.89,4541.89 C4.2 ; C4.2@1935,4538.11 1937.26,4540.37 2008.48,4540.37 R1.1 R1.1@2009.63,4538.48
NetA2_2: A2.2 C5.1 R7.1 | length 554.6
  Bottom Layer w10: R7.1 1046.16,4507.39 1068.55,4485 C5.1 1068.55,4311.45 1085,4295 1304.8,4295 1340,4259.8 A2.2
NetA2_3: A2.3 C6.2 R6.1 | length 598.3
  Bottom Layer w10: R6.1 1203.11,4615.73 C6.2 1203.11,4481.89 1399.06,4285.94 A2.3
NetB1_1: B1.1 B2.1 C1.1 F1.2 | length 2083.1
  Top Layer w10: B1.1 2415.28,3285 C1.1
  Bottom Layer w10: B2.1 1232.56,2615 F1.2 1706.81,3077.44 2059.65,3430.28 B1.1
NetB1_2: B1.2 B2.4 C1.2 P1.1 P2.1 | length 1664.9
  Top Layer w10: B2.4 1700,2615 P1.1 ; C1.2 1725,2815.28 P1.1 ; B1.2 2270,2745 P2.1 2105,2580 1785,2580 P1.1
NetB2_2: B2.2 U1.1 | length 473.3
  Top Layer w10: B2.2 1100,2964.13 U1.1
NetB2_3: B2.3 U1.2 | length 470
  Top Layer w10: B2.3 1414.96,2972.01 U1.2
NetB3_2: B3.2 Q1.1 | length 638.5
  Top Layer w10: Q1.1 3319.02,3121.3 3319.02,2800.98 B3.2
NetB3_3: B3.3 R3.1 | length 1159.3
  Top Layer w10: R3.1 3435,3630 3590,3475 3590,2730 B3.3
NetC10_1: C10.1 R12.2 R14.2 Y1.2 | length 668.6
  Bottom Layer w10: R12.2 1573.66,4542.5 1573.66,4382.5 R14.2 1575.31,4380 1567.08,4371.76 1567.08,4370.92 1560.79,4364.63 Y1.2 1560.79,4129.21 1615,4075 1710.39,4075 1748.66,4113.27 1750.63,4113.27 1760.39,4123.03 C10.1
NetC11_1: C11.1 R13.2 R14.1 Y1.1 | length 580.3
  Bottom Layer w10: R14.1 1614.68,4380 1660.08,4334.61 Y1.1@1660.08,4185.87 ; Y1.1 Y1.1@1660.08,4185.87 ; R13.2 1989.62,4270.78 1900.38,4270.78 C11.1 1744.61,4270.39 Y1.1@1660.08,4185.87
NetF1_1: F1.1 P1.2 P2.2 | length 870.3
  Bottom Layer w10: F1.1 1695,2785 1840,2640 P1.2 1985,2580 2305,2580 P2.2
NetJ6_2: J6.2 R5.1 | length 159.6
  Bottom Layer w10: R5.1 1242.08,4728.24 1249.6,4728.24 1328.78,4807.42 1328.78,4831.81 J6.2
NetJ6_3: J6.3 R4.1 | length 120.3
  Bottom Layer w10: J6.3 1358.04,4833.89 1358.04,4715.8 R4.1
NetP9_1: P9.1 R9.2 S4.1 S4.2 | length 1187.9
  Top Layer w10: P9.1 3030,2785.27 3056.42,2811.69 S4.2 S4.1 3056.42,3601.42 3169.76,3714.76 R9.2
NetP9_4: P9.4 R16.2 | length 1656.8
  Bottom Layer w10: R16.2 1915,3870.31 1984.69,3870.31 2750.75,3104.25 2750.75,2630.75 P9.4
NetP10_1: P10.1 Q1.3 | length 256.3
  Top Layer w10: Q1.3 3314.69,3365 P10.1
NetQ1_2: Q1.2 R3.2 S1.3 | length 904.9
  Top Layer w10: R3.2 3259.41,3626.06 3160,3526.65 3160,3400 Q1.2 3335,3225 3335,2970 3393.43,2911.57 S1.3
NetR11_2: R11.2 R17.2 | length 850
  Bottom Layer w10: R11.2 1459.76,4100.24 1650,3910 R17.2
"OTG ID": J6.4 R10.1 | length 147.6
  Bottom Layer w10: J6.4 1382.83,4797.48 1460.32,4720 R10.1
RX0: B4.11 P9.2 P12.8 | length 2353.1
  Top Layer w10: v1(3115,4420) 3115,4505.94 3135,4525.94 B4.11
  Bottom Layer w10: P9.2 3009.25,2689.25 3009.25,4364.25 3065,4420 v1(3115,4420) 3115,4361.17 3236.17,4240 P12.8
RX1: B4.5 P6.3 P11.5 | length 834.4
  Top Layer w10: P11.5 2419.93,4594.93 2419.93,4644.85 2478.19,4703.11 B4.5 2666.89,4703.11 v1(2830,4540)
  Bottom Layer w10: P6.3 v1(2830,4540)
SCL: B4.3 D1.3 P4.3 P5.3 P11.7 | length 2270.2
  Top Layer w10: D1.3 P5.3 ; P11.7 2446.22,4821.22 B4.3
  Bottom Layer w10: P11.7 2685.89,4740 2770.51,4655.38 2770.51,4210.51 P5.3 2700,3805 P4.3
SDA: B4.4 D1.4 P4.4 P5.4 P11.6 | length 2269.7
  Top Layer w10: D1.4 P5.4 ; P11.6 2365,4648.98 2478.19,4762.17 B4.4 ; v1(2680,4560) 2680,3925 P4.4
  Bottom Layer w10: P5.4 2455,3615 2840,3615 P4.4 ; P11.6 2600,4640 v1(2680,4560)
SET: B4.7 P11.3 R16.1 R17.1 | length 1190.5
  Top Layer w10: B4.7 v1(2575,4585)
  Bottom Layer w10: R17.1 1799.42,3909.42 1914.42,3909.42 R16.1 1915,3957.06 2297.94,4340 P11.3 2570,4545 2570,4580 v1(2575,4585)
TX0: B4.12 P9.3 P12.7 | length 2463.2
  Top Layer w10: P9.3 3015,2795 3015,4075 P12.7@3280,4340 ; B4.12 3095,4585 3065,4555 3065,4365 3090,4340 P12.7@3280,4340 ; P12.7 P12.7@3280,4340
TX1: B4.6 P6.4 P11.4 | length 860.1
  Top Layer w10: P11.4 2435.91,4510.91 2435.91,4601.78 2478.19,4644.06 B4.6 2670.94,4644.06 2930,4385 P6.4
VDD3.3V: B4.1 C7.1 C8.1 P11.9 R7.2 R8.1 R9.1 R11.1 | length 4605.3
  Top Layer w10: P11.9 2489.33,4940 B4.1 2775.67,4939.33 3015,4700 v1(3015,4490) ; v1(3050.98,3740) R9.1
  Layer 2 - Power w10: v1(1600,4930) 1795,4930 v1(1860,4865) 1970.51,4975.51 2326.52,4975.51 2362.03,4940 P11.9 ; v1(3015,4490) 3015,3775.98 v1(3050.98,3740)
  Bottom Layer w10: R7.2 1083.84,4606.16 1025,4665 1025,4920 1095,4990 1545.22,4990 1600,4935.22 v1(1600,4930) 1600,4705 1554.02,4659.02 1389.02,4659.02 1340,4610 C8.1 ; C7.1 1275.59,4533.11 1284.17,4541.69 1284.17,4542.28 1311.89,4570 C8.1 ; R11.1 1430.24,4535.24 1415,4520 1355,4520 1340,4535 C8.1 ; R8.1 1835,4833.43 1860,4858.43 v1(1860,4865)
VUSB: J6.1 R6.2 | length 306.9
  Bottom Layer w10: R6.2 1062,4720 1070.24,4728.24 1070.24,4734.25 1111.44,4775.45 1265.53,4775.45 1306.06,4815.98 J6.1
pads on no net: S1.1
copper on no net:
  other v1: 2020,4600

## Polygon pours and split planes (outlines as drawn)
5V on Layer 2 - Power "5V_L03_P023" (solid, pour order 23): 1000,2555 3620,2555 3620,5015 1000,5015
GND on Bottom Layer "GND_L04_P024" (solid, pour order 24): 1000,2555 3620,2555 3620,5015 1000,5015
GND on Top Layer "GND_L01_P025" (solid, pour order 25): 1000,2555 3620,2555 3620,5015 1000,5015
GND on Layer 1 - GND "GND_L02_P026" (solid, pour order 26): 1000,2555 3620,2555 3620,5015 1000,5015

## Silkscreen, mask and mechanical layers (free items; w line width, h text height)
Top Overlay:
  text "G" at 3500,4885 h55
  text "AO" at 3495,4780 h55
  text "DO" at 3495,4685 h55
  text "5V" at 3500,4585 h55
  text "AO" at 3505,3995 h55
  text "DO" at 3500,3900 h55
  text "G" at 3500,3800 h55
  text "5V" at 3500,3700 h55
  text "BOOT" at 2475,2725 h55
  text "EN" at 2800,2720 h55
Bottom Overlay:
  text "5V" at 2155,4920 h55
  text "IO0" at 3230,4920 h55
  text "V3.3V" at 2670,4910 h55
  text "EN" at 2520,4815 h55
  text "IO1" at 3235,4815 h55
  text "3.3V" at 2155,4800 h55
  text "SCL" at 2560,4725 h55
  text "IO2" at 3230,4720 h55
  text "GND" at 2160,4700 h55
  text "SDA" at 2570,4620 h55
  text "IO3" at 3230,4610 h55
  text "GND" at 2660,4535 h55 r90
  text "RX1" at 2545,4510 h55
  text "D+" at 3240,4510 h55
  text "5V" at 2760,4485 h55 r90
  text "RX" at 2860,4480 h55 r90
  text "TX" at 2965,4480 h55 r90
  text "TX1" at 2545,4410 h55
  text "D-" at 3440,4410 h55
  text "TX0" at 3490,4315 h55
  text "SET" at 2570,4310 h55
  text "IO9" at 2555,4210 h55
  text "RX0" at 3485,4210 h55
  text "IO10" at 3525,4115 h55
  text "GND" at 2570,4105 h55
  text "GND" at 2155,3975 h55
  text "3.3V" at 2615,3975 h55
  text "3.3V" at 2650,3935 h55 r90
  text "GND" at 2745,3890 h55 r90
  text "SCL" at 2845,3890 h55 r90
  text "SDA" at 2945,3890 h55 r90
  text "5V" at 2150,3875 h55
  text "GND" at 2565,3875 h55
  text "SCL" at 2560,3785 h55
  text "SCL" at 2155,3770 h55
  text "SDA" at 2560,3690 h55
  text "SDA" at 2155,3675 h55
  text "FAN+" at 3490,3640 h55 r90
  text "FAN-" at 3595,3640 h55 r90
  text "DIY Air Quality Monitor 1.1" at 2025,3380 h60
  text "2023/04/04" at 2010,3290 h60
  text "GND" at 2650,2805 h55 r90
  text "TX" at 2875,2760 h55 r90
  text "RX" at 2965,2760 h55 r90
  text "5V" at 2560,2755 h55 r90
  text "RST" at 3140,2675 h55
  text "SET" at 2800,2670 h55
Mechanical 1:
  lines w10: 754.82,2635 774.82,2575 ; 754.82,4960 774.82,5020 ; 764.82,2575 784.82,2575 ; 764.82,5020 784.82,5020 ; 774.82,3670 774.82,2575 ; 774.82,3924.99 774.82,5020 ; 794.82,2635 774.82,2575 ; 794.82,4960 774.82,5020 ; 992.5,5155 992.5,5175 ; 1052.5,5145 992.5,5165 ; 1052.5,5185 992.5,5165 ; 2185.01,5165 992.5,5165 ; 2440,5165 3632.5,5165 ; 3572.5,5145 3632.5,5165 ; 3572.5,5185 3632.5,5165 ; 3632.5,5155 3632.5,5175 ; 1000,2555 1000,5015 3620,5015 3620,2555 1000,2555
  text "2640 (mil)" at 2195.01,5139.82 h60
  text "2445 (mil)" at 800,3680 h60 r90